# Altium PCB LM2596.PcbDoc
Units mil, origin at the board's own origin, x right, y up, seen from the top; angles counter-clockwise.
Board outline 1710 x 1100 mil, 2 copper layers (Top Layer, Bottom Layer); 9 components, 5 nets, 22 pads, 1 vias.
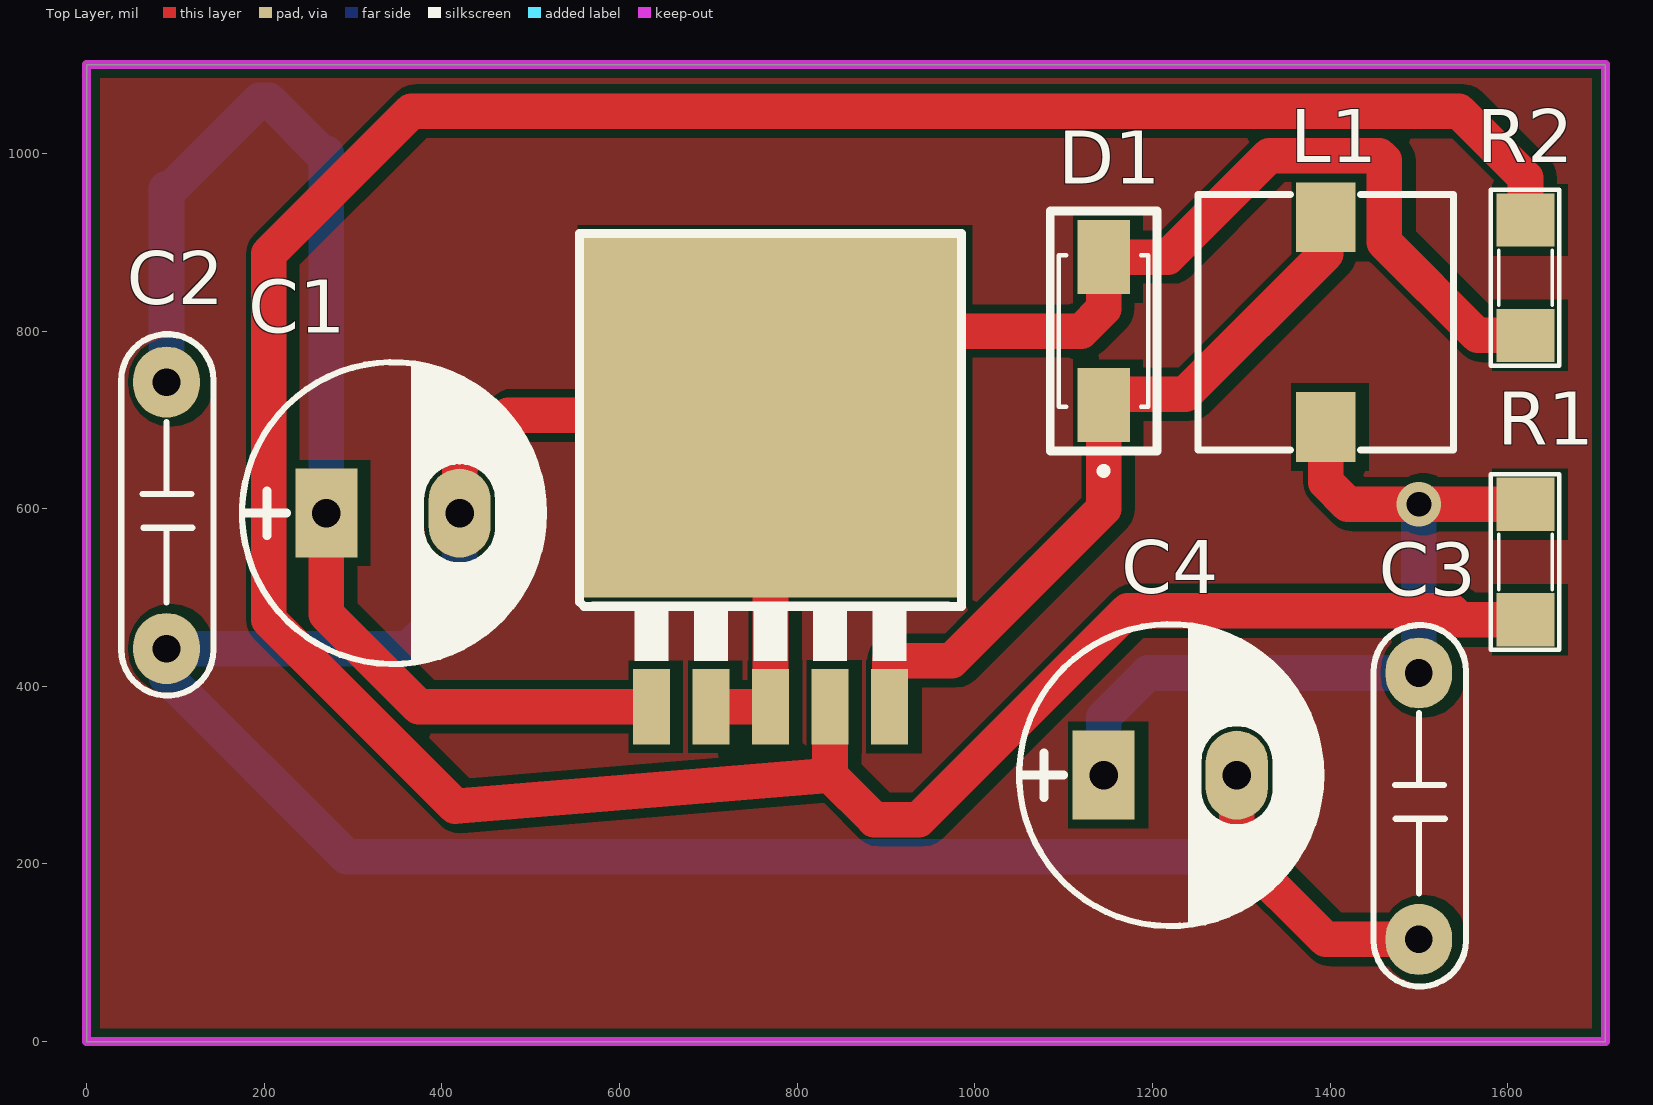
[diagram p0: Top Layer view]
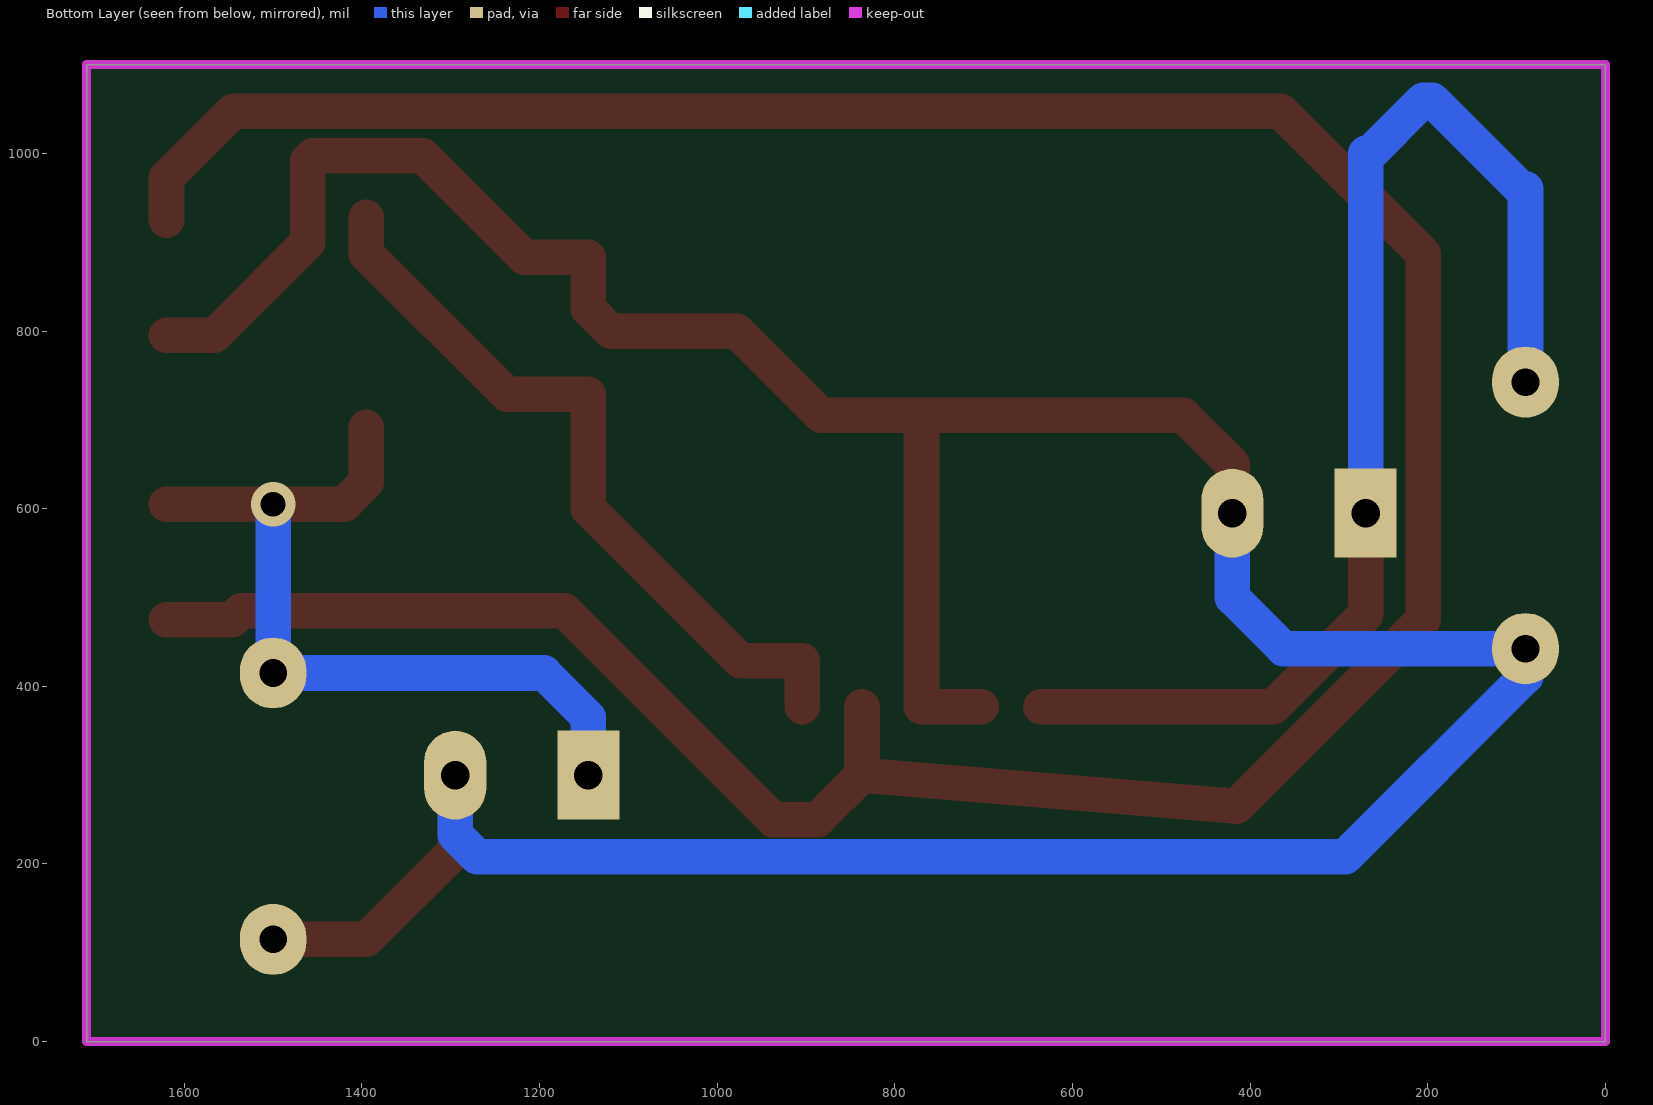
[diagram p1: Bottom Layer view, seen from below]
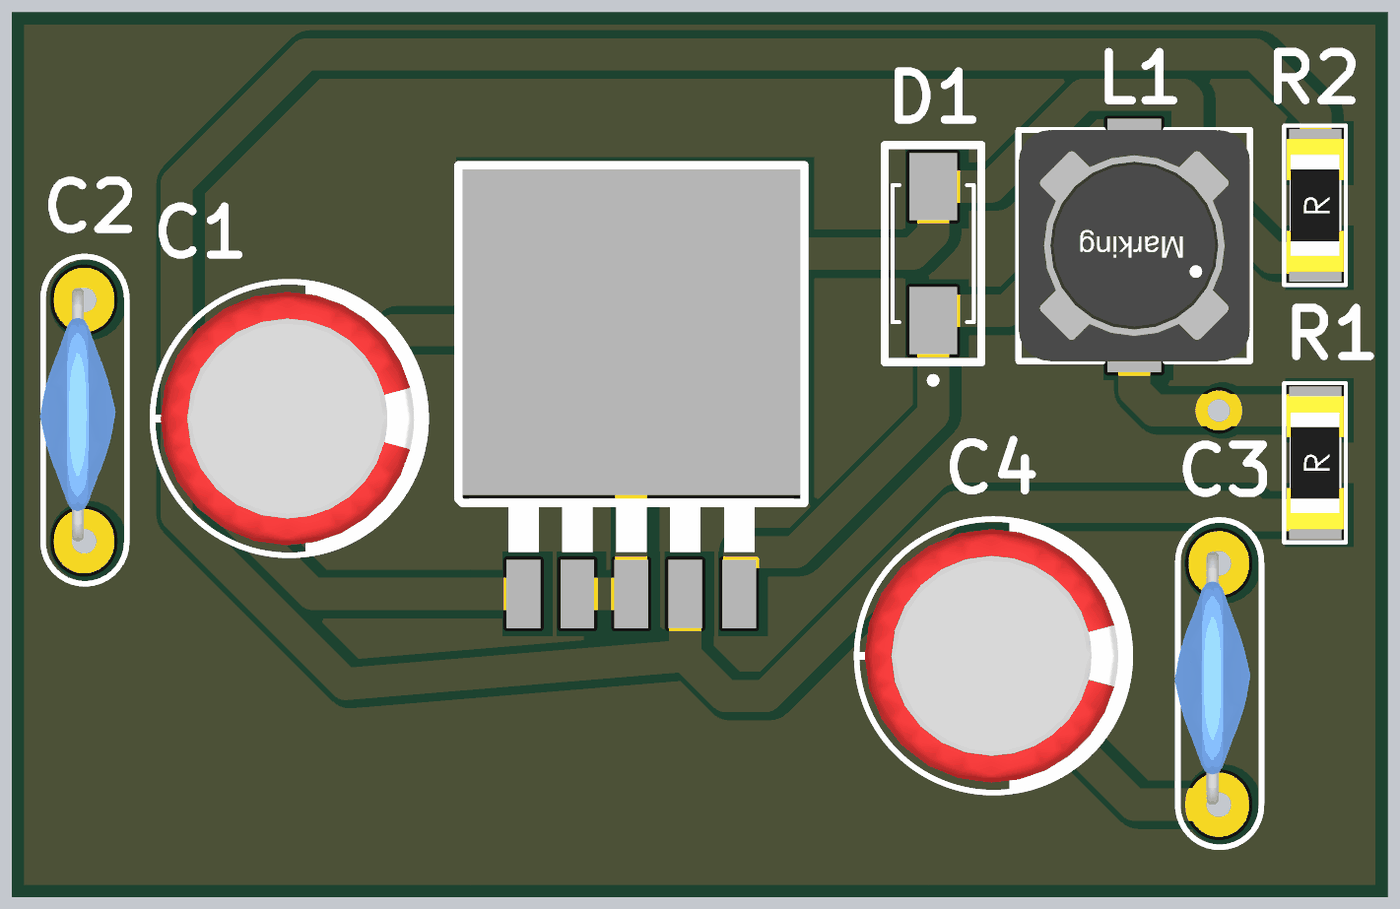
[diagram p2: 3D render of the assembled board from above, using the file's embedded part models]

## Layer stack, top to bottom
Top Solder: solder mask 0.4, Solder Resist, Dk 3.5
Top Layer: signal copper 1.4
Dielectric 1: dielectric 12.6, FR-4, Dk 4.8
Bottom Layer: signal copper 1.4
Bottom Solder: solder mask 0.4, Solder Resist, Dk 3.5

## Board outline
0,0 1710,0 1710,1100 0,1100

## Design rules (kind name [scope] priority, off if disabled: settings)
Clearance [All] p1: gap=10 ignorepadtopadclearanceinfootprint=FALSE except(0: Arc-Hole Track-Hole SMDPad-Hole THPad-Hole Via-Hole Fill-Hole Poly-Hole Region-Hole Text-Hole)
PolygonConnect [All] p1: connectstyle=Relief reliefconductorwidth=10 reliefentries=4 polygonreliefangle="90 Angle" airgapwidth=10
RoutingVias [All] p1: holewidth=28 width=50 viastyle="Through Hole" minholewidth=28 minwidth=50 maxholewidth=28 maxwidth=50
SolderMaskExpansion [All] p1: expansion=4 istentingtop=FALSE
Width [All] p1: maxlimit=50 minlimit=30 preferedwidth=40 minimp=50.000000 maximp=50.000000 favimp=50.000000
30 further rules are at their usual default settings.

## Components (designator, comment, footprint, x,y, rotation, side; value= is the part's Value field where it differs from the comment)
C1 "470uF" CP1.5/3.4 270,595 r0 top value=100uF/35V/50V
C2 "0.1uF" CN3 90,442.5 r90 top value=0,047uF
C3 "0.1uF" CN3 1500,115 r90 top value=0,047uF
C4 "470uF" CP1.5/3.4 1145,300 r0 top value=100uF/35V/50V
D1 "TSSA3U45" DIOM4325X250N 1145,800 r90 top
L1 "47uH" L-SMD-M-7.3x4.5 1395,810 r0 top
R1 "4.7k" SM-1206 1620,540 r90 top value="R1/4W - 1K"
R2 "1.5k" SM-1206 1620,860 r90 top value="R1/4W - 1K"
? "LM2596ADJ" LM2596ADJ 770,605 r0 top

## Footprints (in the part's own frame and the unit in brackets; to place one, negate y for a bottom-side part, rotate by r counter-clockwise, add the part's x,y. Pads: shape width x height; smd on the part's side, far side on the other; paste and mask are expansions set on the pad)
CN3 [mil] "Cap np W 0.3"
  oval 80x75 hole 31: 1(0,0) 2(300,0)
  silkscreen extent -53,-53 354,51, body extent 0,-39 315,55, height 419
CP1.5/3.4 [mil] "Tu hoa 220->470uF,16V, 470uF/16V,25V"
  rect 70x100 hole 32: 1(0,0)
  oval 70x100 hole 32: 2(150,0)
  silkscreen extent -95,-170 245,170, body extent -85,-157 230,157, height 446
DIOM4325X250N [mm]
  rect 2.12x1.5 smd: A(2.115,0) C(-2.115,0)
  silkscreen extent -4.1,-1.28 2.16,1.28
L-SMD-M-7.3x4.5 [mm] "WE-PDA SMD Shielded Power Inductor, 7345"
  rect 1.7x2 smd: 1(0,3) 2(0,-3)
  silkscreen extent -3.65,-3.65 3.65,3.65, body extent -3.65,-3.65 3.65,3.65, height 4.05
LM2596ADJ [mil]
  rect 42x85 smd: 1(-134,-228) 2(-67,-228) 3(0,-228) 4(67,-228) 5(134,-228)
  rect 425.2x409.84 smd: 6(0,100)
  silkscreen extent -201,-176 201,-110
SM-1206 [mil] "Compoment SMD 120x60mil"
  rect 60x65 smd: 1(-65,0) 2(65,0)
  silkscreen extent -99,-38 99,39, body extent -83,-35 83,36, height 25

## Part data
C1 C4: library part CP3, "Cap 100uF/35V - 470uF/16V", Description 1="1000uF/6,3V - 470uF/16V - 330uF - 25V", Description 2="220uF/35V - 100uF/50V - 63V - 4,7uF/200V", Description 3="22uF => 33uF100V - 3,3uF => 4,7uF/250V", Description 4="2,2uF =>3,3uF/350 - 2,2uF/400V - 1uF/450V"
C2 C3: library part CN3, "Cap np W0.3", Copyright=VanDungEvn
D1 ?: Package=None, Availability=Unavailable, Price=None
  D1: MP=TSSA3U45
  ?: MF="First Components", MP=LM2596-ADJ, SnapEDA_Link=https://www.snapeda.com/parts/LM2596-ADJ/First%20Components/view-part/557542/?ref=snap
L1: library part L-SMD-1, Inductance="1.0 μH", Manufacturer="Wurth Elektronik", partNo=78477010, ComponentLink1Description=Manufacturer, ComponentLink1URL=http://www.we-online.de, ComponentLink2Description=Datasheet, ComponentLink2URL=http://katalog.we-online.de/pbs/datasheet/78477010.pdf, Created by="Baojun Chen", Created Date=Nov.2015
R1 R2: library part R, "Resistor 1/4W"

## Via types
v1: diameter 50, hole 28, Top Layer to Bottom Layer, 1 vias

## Nets (pads, with @x,y where several pads share a name; then routed paths per layer and width w, separated by ;. In a path a pad name is that pad's centre, name@x,y a point inside that pad or via, vN(x,y) a via of type N, cw(c..) or ccw(c..) an arc to the next point about the centre after c; other vN are vias at no path point)
GND: ?.2 ?.3 ?.6 C1.2 C2.1 C3.1 C4.2 D1.A R2.1 | length 4144
  Top Layer w40: C1.2 420,650 475,705 ?.6 ; ?.2 ?.3 ?.6 ; C4.2 1295,215 1395,115 C3.1 ; R2.1 1566,795 1461,900 1461,992 1455.52,997.48 1331.53,997.48 1217.32,883.27 D1.A 1145,825 1120,800 978,800 883,705 ?.6
  Bottom Layer w40: C1.2 420,500 362.5,442.5 C2.1 90,411 293,208 1270,208 1295,233 C4.2
Net_4: ?.4 R1.1 R2.2 | length 3674.6
  Top Layer w40: ?.4 837,300 ; R1.1 1546,475 1536,485 1172,485 937,250 887,250 837,300 ; R2.2 1620,972.48 1545,1047.48 365.48,1047.48 205,887 205,475 415,265 837,300
Net_5: ?.5 D1.C L1.1 | length 849.4
  Top Layer w40: ?.5 904,429 974,429 1145,600 D1.C 1145,729 1237,729 1395,887 L1.1
"Vin = 24V": ?.1 C1.1 C2.2 | length 1396
  Top Layer w40: C1.1 270,481 374,377 ?.1
  Bottom Layer w40: C2.2 90,960 ; 90,955 195,1060 205,1060 270,995 ; C1.1 270,1000
"Vout = 5V/3A": C3.2 C4.1 L1.2 R1.2 | length 928
  Top Layer w40: L1.2 1395,630 1420,605 v1(1500,605) R1.2
  Bottom Layer w40: C4.1 1145,365 1195,415 C3.2 v1(1500,605)

## Polygon pours and split planes (outlines as drawn)
no net on Top Layer "NONET_L01_P-001" (solid, pour order 0): 0,1100 1710,1100 1710,0 0,0

## Keep-outs
Keep-Out Layer:
  the board outline again, w10

## Silkscreen, mask and mechanical layers (free items; w line width, h text height)
Top Overlay:
  lines w10: 555,495 560,490 985,490 985,910 555,910 555,495 ; 1085,665 1205,665 1205,935 1085,935 1085,665